# EAGLE board RAVEN_-_Final_Transponder_Layout (EAGLE 9.7.0)
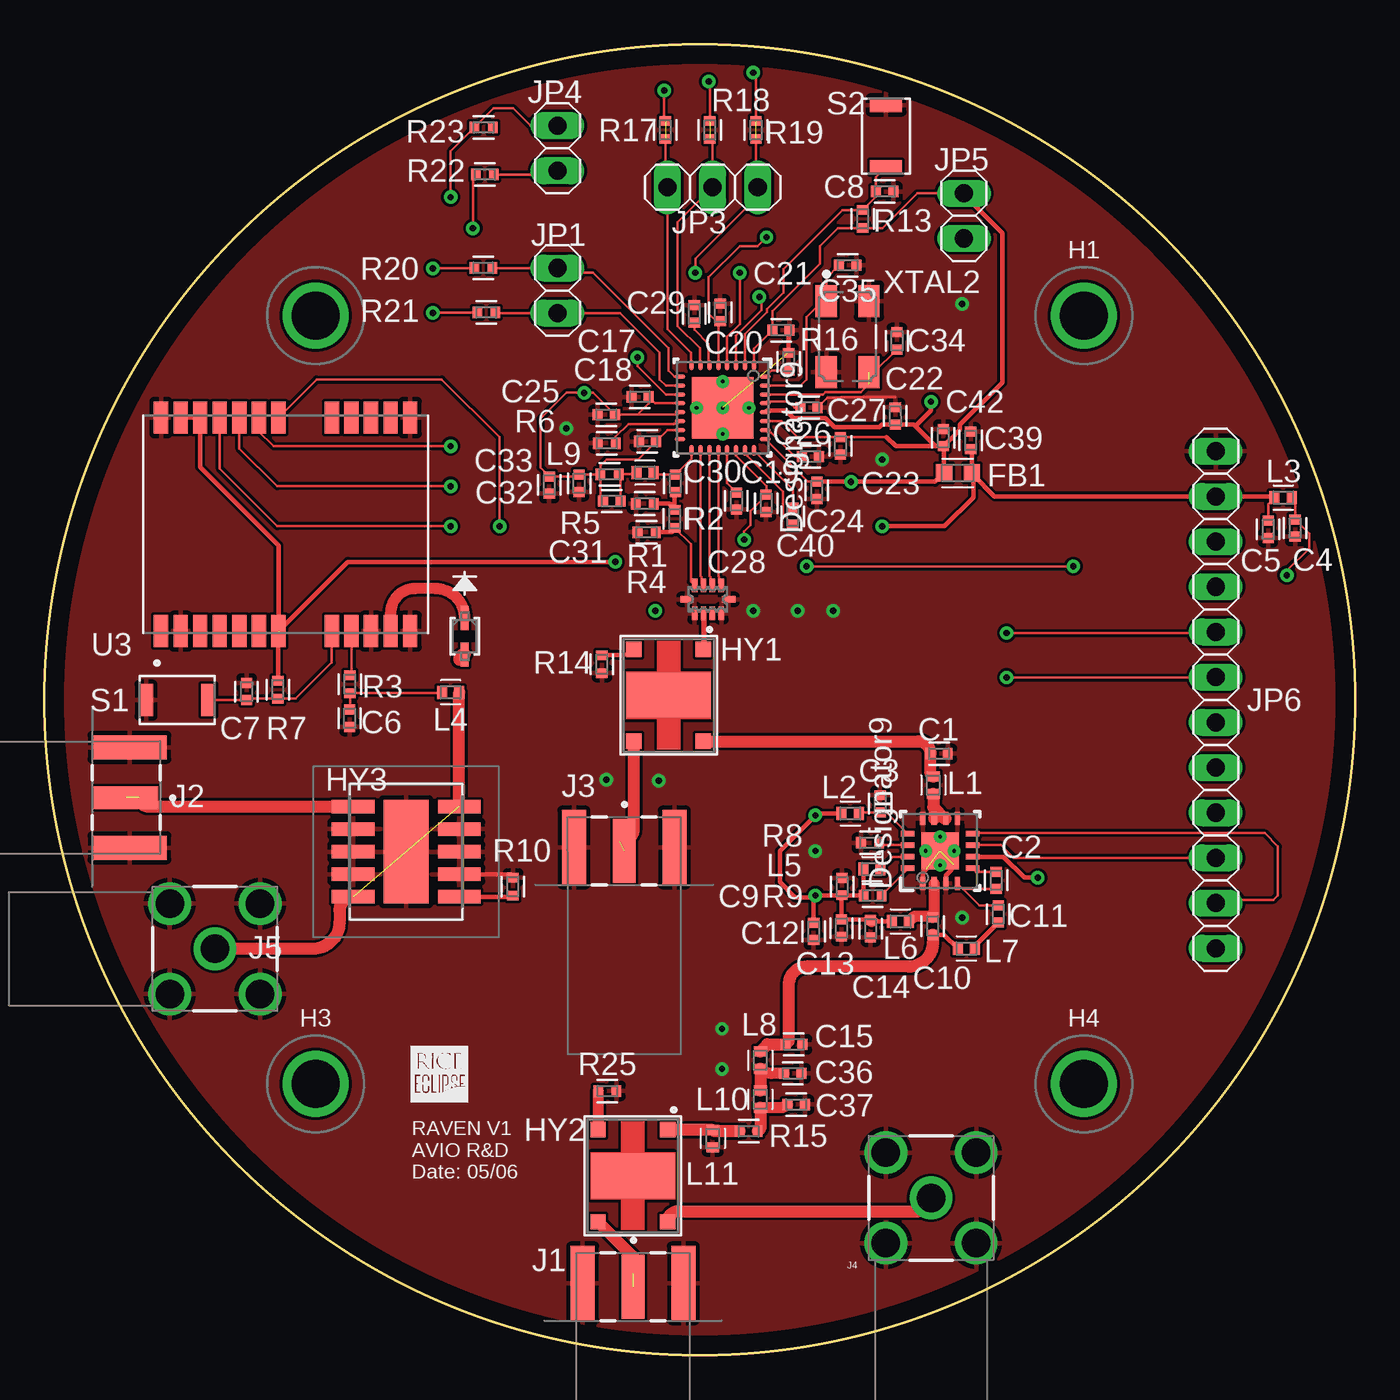
[diagram p0: board, top side]
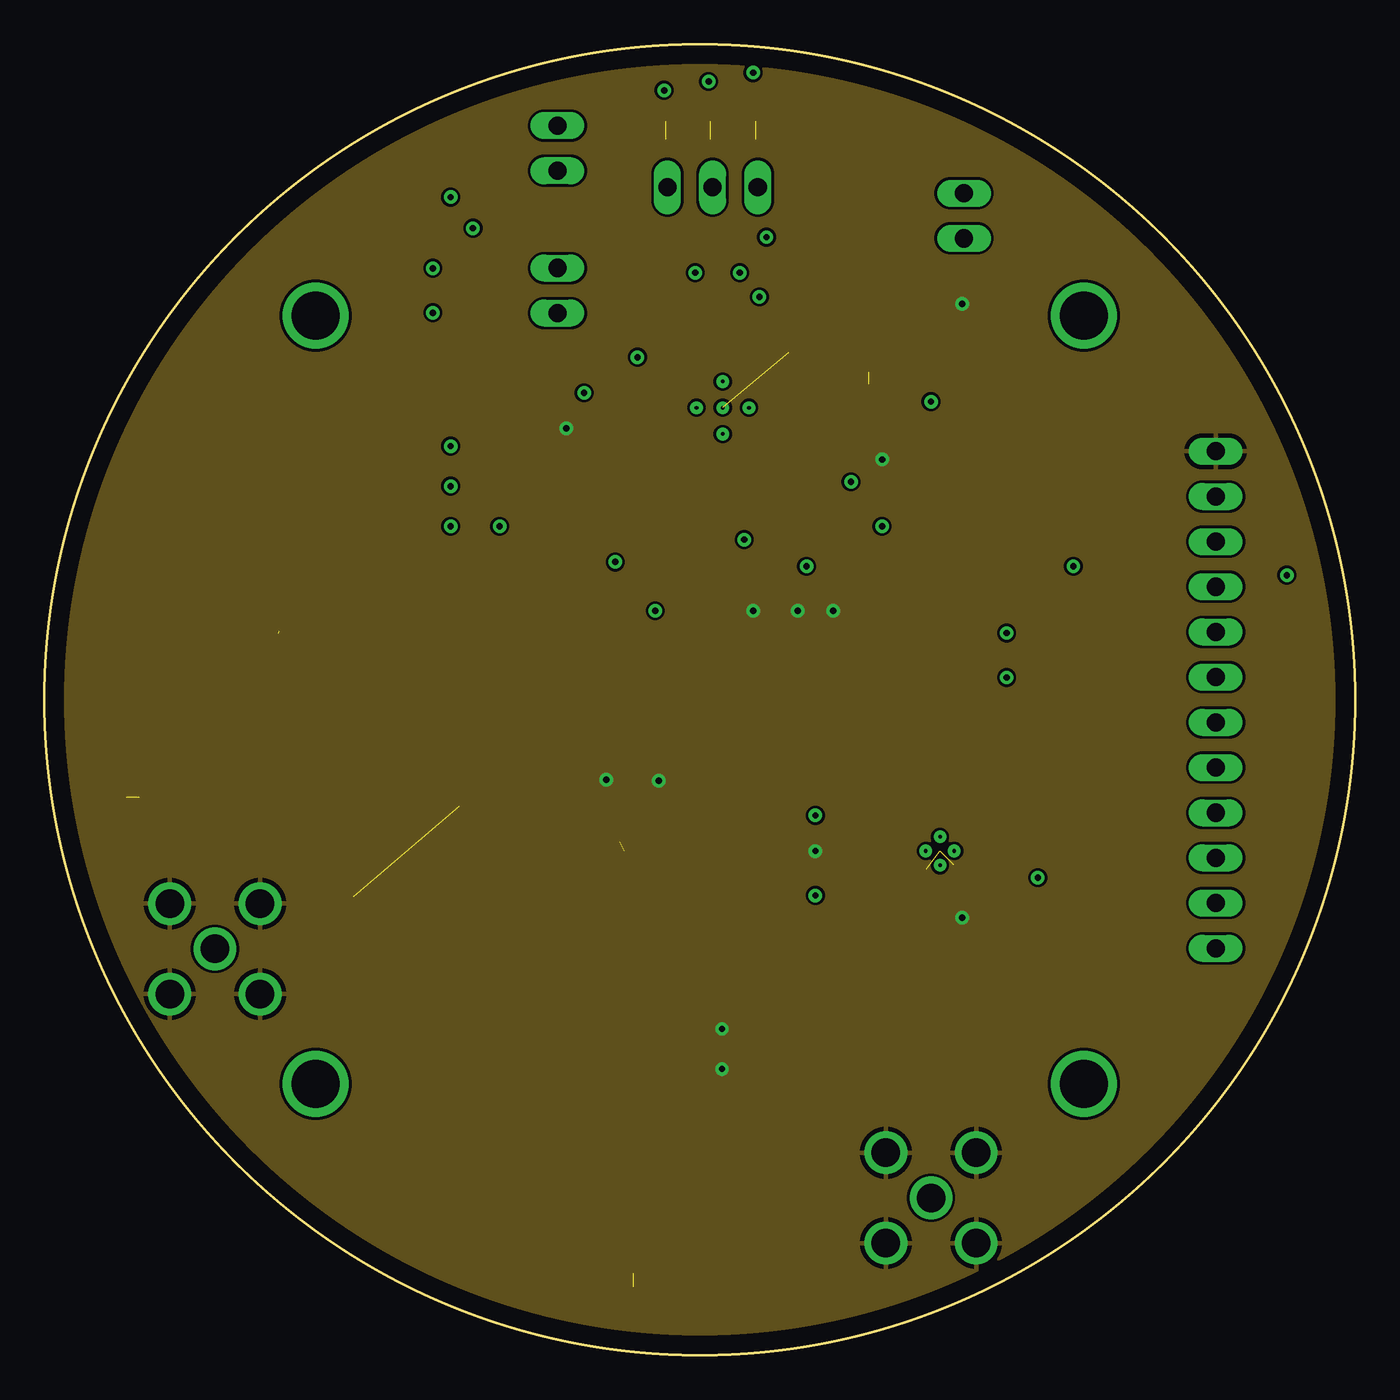
[diagram p1: board, inner layer Route2]
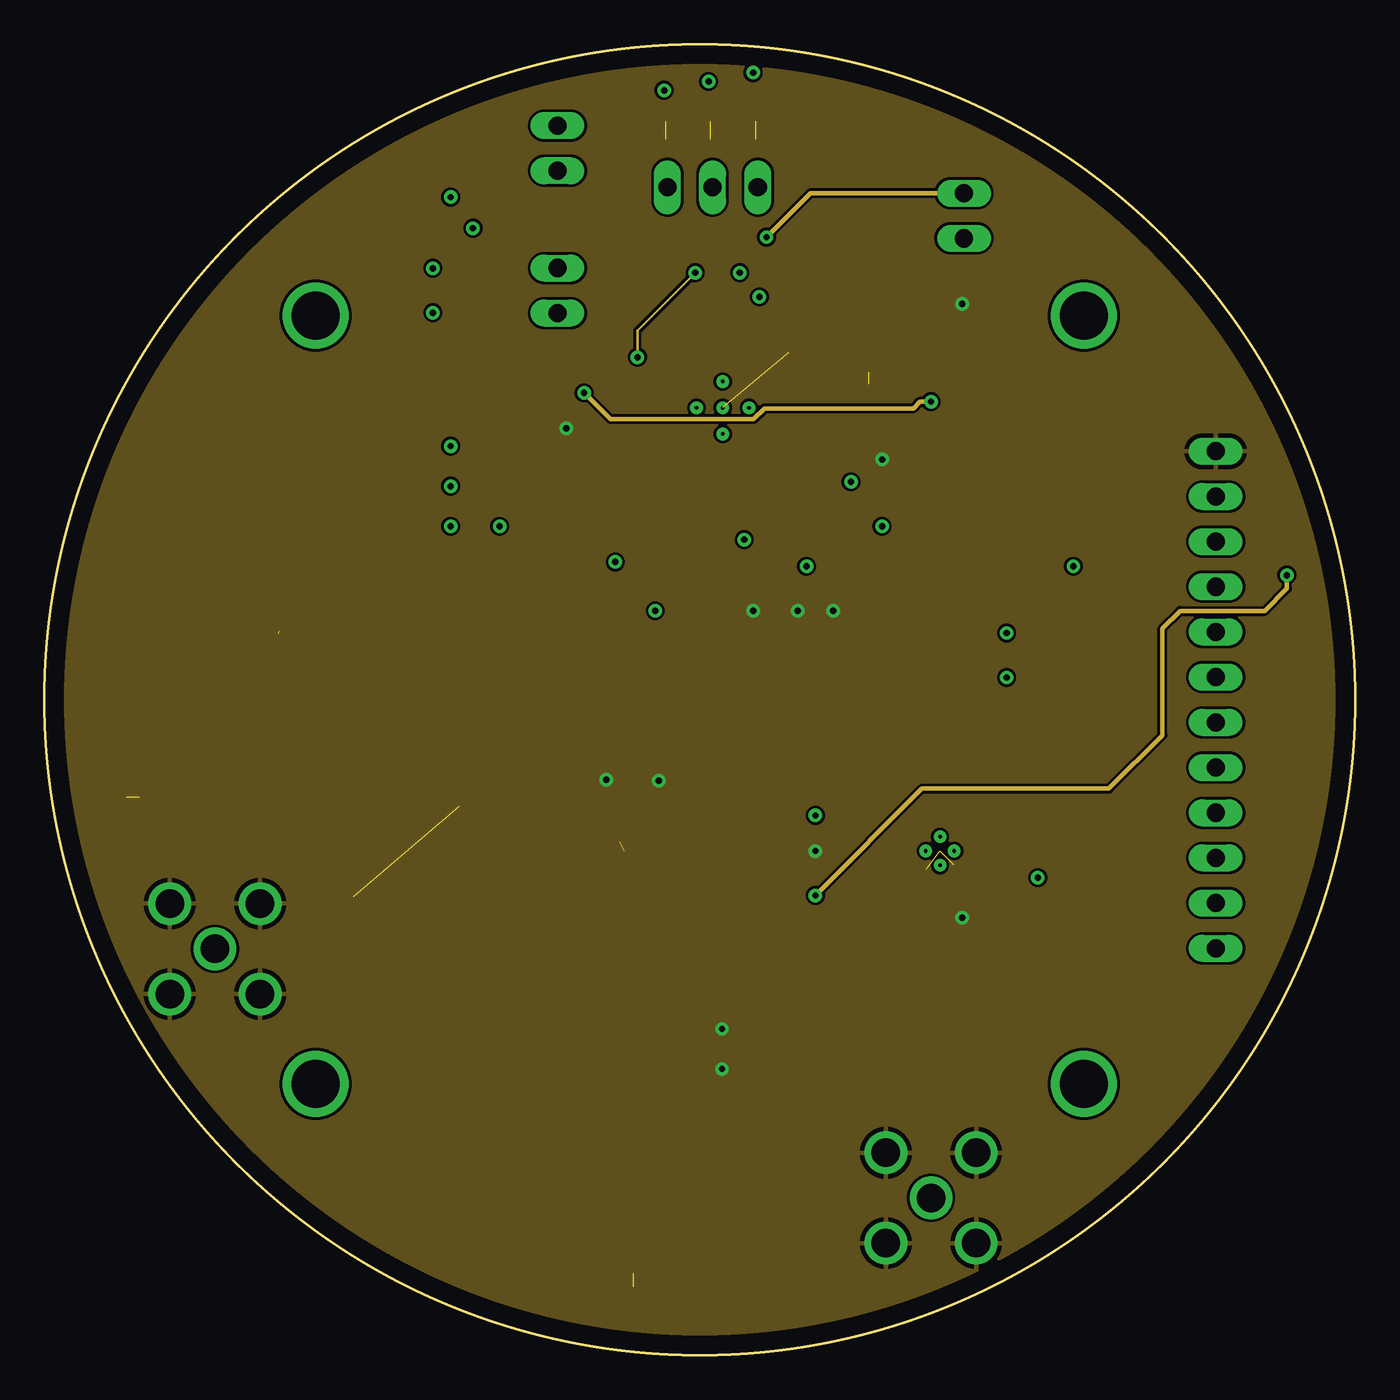
[diagram p2: board, inner layer Route15]
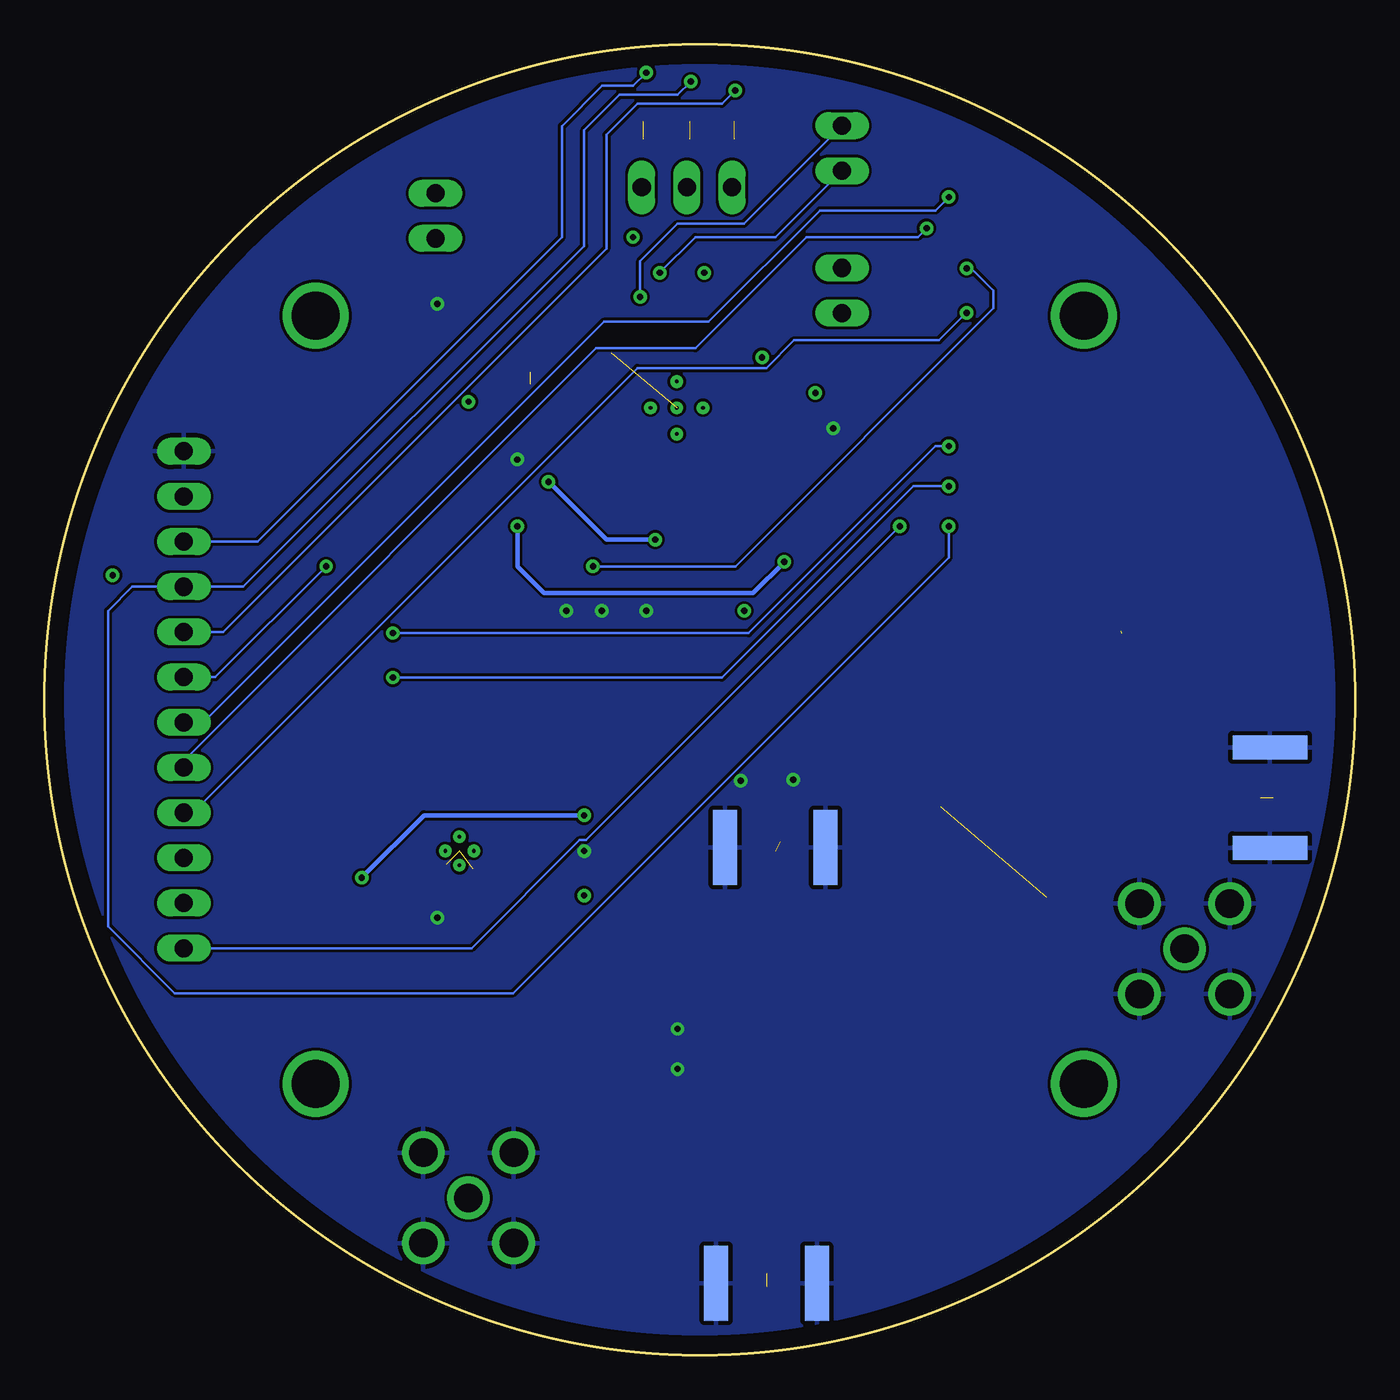
[diagram p3: board, bottom side, seen from below]

Size 73.66 x 73.66 mm. Coordinates in mm from the lower left corner, seen from the top.
Outline: circle at 36.83,36.83 radius 36.83
Copper layers (1+2*15+16): Top 0.035mm / dielectric 1.5mm / Route2 0.035mm / dielectric 0.15mm / Route15 0.035mm / dielectric 0.2mm / Bottom 0.035mm
Design rules "Fusion Electronics Design Rules *": minimum track width 6mil, minimum drill 0.35mm, track to track 6mil, track to pad 6mil, pad to pad 6mil, via to via 6mil, smd to smd 6mil, copper to edge 40mil, drill to drill 6mil, minimum pad ring 10mil, minimum via ring 8mil, stop-mask expansion 4mil, vias tented up to drill 9999mil, thermal gap 10mil
Net classes: 0 Default: width 0.15 mm, drill 0.35 mm, clearance 0.15 mm; 3 Antenna: width 1 mm, clearance 0.3 mm

## Footprints (pad centres in the part's own frame; a part is rotated, then mirrored left to right if it is on the bottom)
CAPC1005X60 = smd 0.56 x 0.629: 1 -0.485,0; 2 0.485,0
SOD323_NEX = smd 1.359 x 0.457: 1 -1.022,0; 2 1.022,0
BEADC1608X95N = smd 0.9 x 0.97: 1 -0.785,0 | smd 0.933 x 0.97: 2 0.769,0
MOUNTINGHOLE_MOUNTINGHOLE_2.7MM_M2.5 = drill 2.7 pad 2.7: UN 0,0
COUPLER_XC0900P-10S = smd 0.864 x 0.864: 1 -2.591,1.956; 2 2.591,1.956; 3 2.591,-1.956; 4 -2.591,-1.956 | smd 2.5 x 4.7: 5 0,0
BDCA1025 = smd 0.76 x 2.41: 1 -2.54,2.985; 2 -1.27,2.985; 3 0,2.985; 4 1.27,2.985; 5 2.54,2.985; 6 2.54,-2.985; 7 1.27,-2.985; 8 0,-2.985; 9 -1.27,-2.985; 10 -2.54,-2.985 | smd 5.84 x 2.54: 11 0,0
SAMTEC_SMA-J-P-H-ST-EM1 = smd 1.27 x 3.6: 1 0,0 | smd 1.35 x 4.2: 2_1 -2.825,0.2; 3_1 2.825,0.2 | smd 1.35 x 4.2 bottom: 2_2 -2.825,0.2; 3_2 2.825,0.2
SAMTEC_SMA-J-P-X-RA-TH1 = drill 1.6: 1 0,0; 2 2.54,-2.54; 3 2.54,2.54; 4 -2.54,2.54; 5 -2.54,-2.54
1X02 = drill 1.016 long: 1 -1.27,0; 2 1.27,0
1X03 = drill 1.016 long: 1 -2.54,0; 2 0,0; 3 2.54,0
1X12 = drill 1.016 long: 1 -13.97,0; 2 -11.43,0; 3 -8.89,0; 4 -6.35,0; 5 -3.81,0; 6 -1.27,0; 7 1.27,0; 8 3.81,0; 9 6.35,0; 10 8.89,0; 11 11.43,0; 12 13.97,0
INDC1006X60N = smd 0.56 x 0.729: 1 -0.485,0; 2 0.485,0
RESC1005X40 = smd 0.535 x 0.644: 1 -0.507,0; 2 0.507,0
B3U-1000P(M) = smd 0.8 x 1.8: 1 -1.75,0; 2 1.75,0
LFD21868MMF1D386_MUR = smd 0.737 x 0.305: 1 -0.787,0.75; 2 -0.787,0.25; 3 -0.787,-0.25; 4 -0.787,-0.75; 6 0.787,-0.75; 7 0.787,-0.25; 8 0.787,0.25; 9 0.787,0.75 | smd 0.356 x 0.737: 5 0,-1.168; 10 0,1.168
RHB0032E = smd 0.6 x 0.24: 1 -2.4,1.75; 2 -2.4,1.25; 3 -2.4,0.75; 4 -2.4,0.25; 5 -2.4,-0.25; 6 -2.4,-0.75; 7 -2.4,-1.25; 8 -2.4,-1.75; 17 2.4,-1.75; 18 2.4,-1.25; 19 2.4,-0.75; 20 2.4,-0.25; 21 2.4,0.25; 22 2.4,0.75; 23 2.4,1.25; 24 2.4,1.75 | smd 0.24 x 0.6: 9 -1.75,-2.4; 10 -1.25,-2.4; 11 -0.75,-2.4; 12 -0.25,-2.4; 13 0.25,-2.4; 14 0.75,-2.4; 15 1.25,-2.4; 16 1.75,-2.4; 25 1.75,2.4; 26 1.25,2.4; 27 0.75,2.4; 28 0.25,2.4; 29 -0.25,2.4; 30 -0.75,2.4; 31 -1.25,2.4; 32 -1.75,2.4 | smd 3.45 x 3.45: 33 0,0 | drill 0.203 pad 0.5: V 0,1.475; V_1 -1.475,0; V_2 0,0; V_3 1.475,0; V_4 0,-1.475
XCVR_NEO-M9N-00B = smd 1.8 x 0.8: 1 -6,7; 2 -6,5.9; 3 -6,4.8; 4 -6,3.7; 5 -6,2.6; 6 -6,1.5; 7 -6,0.4; 8 -6,-2.6; 9 -6,-3.7; 10 -6,-4.8; 11 -6,-5.9; 12 -6,-7; 13 6,-7; 14 6,-5.9; 15 6,-4.8; 16 6,-3.7; 17 6,-2.6; 18 6,0.4; 19 6,1.5; 20 6,2.6; 21 6,3.7; 22 6,4.8; 23 6,5.9; 24 6,7
RGV0016A = smd 0.75 x 0.3: 1 -1.825,0.975; 2 -1.825,0.325; 3 -1.825,-0.325; 4 -1.825,-0.975; 9 1.825,-0.975; 10 1.825,-0.325; 11 1.825,0.325; 12 1.825,0.975 | smd 0.3 x 0.75: 5 -0.975,-1.825; 6 -0.325,-1.825; 7 0.325,-1.825; 8 0.975,-1.825; 13 0.975,1.825; 14 0.325,1.825; 15 -0.325,1.825; 16 -0.975,1.825 | smd 2.1 x 2.1: 17 0,0 | drill 0.203 pad 0.5: V 0.8,0; V_1 -0.8,0; V_2 0,-0.8; V_3 0,0.8
OSCSC500X320X110-4N = smd 1.8 x 1.2: 1 -2,-1.2; 2 2,-1.2; 3 2,1.2; 4 -2,1.2

## Placement (x,y rotation side)
C1  0.8pF  [CAPC1005X60]  50.28,33.8 180 top
C2  12pF  [CAPC1005X60]  53.49,26.68 270 top
C3  15pF  [CAPC1005X60]  46.97,30.98 270 top
C4  10µF  [CAPC1005X60]  70.29,46.48 90 top
C5  220pF  [CAPC1005X60]  68.78,46.41 90 top
C6  100nF  [CAPC1005X60]  17.15,35.79 270 top
C7  100nF  [CAPC1005X60]  11.36,37.29 270 top
C8  100nF  [CAPC1005X60]  47.22,65.4 0 top
C9  27pF  [CAPC1005X60]  44.83,26.33 270 top
C10  47pF  [CAPC1005X60]  49.93,24.11 90 top
C11  15pF  [CAPC1005X60]  53.61,24.79 270 top
C12  1µF  [CAPC1005X60]  43.23,23.81 90 top
C13  1nF  [CAPC1005X60]  44.8,24 90 top
C14  47pF  [CAPC1005X60]  46.43,23.96 90 top
C15  3.3pF  [CAPC1005X60]  42.12,17.46 180 top
C17  47nF  [CAPC1005X60]  33.47,53.85 180 top
C18  47nF  [CAPC1005X60]  33.89,51.35 180 top
C19  47nF  [CAPC1005X60]  40.56,47.87 270 top
C20  47nF  [CAPC1005X60]  37.98,58.6 90 top
C21  47nF  [CAPC1005X60]  41.4,57.6 0 top
C22  47nF  [CAPC1005X60]  47.82,52.78 90.5 top
C23  47nF  [CAPC1005X60]  44.74,51.1 270 top
C24  47nF  [CAPC1005X60]  43.41,48.6 270 top
C25  47nF  [CAPC1005X60]  31.58,52.85 180 top
C26  47nF  [CAPC1005X60]  43.05,50.5 0 top
C27  47nF  [CAPC1005X60]  42.97,53.25 0 top
C28  10nF  [CAPC1005X60]  38.89,48 270 top
C29  220nF  [CAPC1005X60]  36.52,58.52 90 top
C30  15pF  [CAPC1005X60]  35.46,49 90 top
C31  33pF  [CAPC1005X60]  31.88,48 0 top
C32  10nF  [CAPC1005X60]  30.05,49 90 top
C33  100pF  [CAPC1005X60]  28.37,48.9 90 top
C34  15pF  [CAPC1005X60]  47.91,57 90 top
C35  15pF  [CAPC1005X60]  45.14,61.25 180 top
C36  7.5pF  [CAPC1005X60]  42.06,15.83 180 top
C37  DNP  [CAPC1005X60]  42.25,14.08 180 top
C39  100µF  [CAPC1005X60]  52.06,51.41 270 top
C40  1.8nF  [CAPC1005X60]  42.05,47.15 90 top
C42  2.2µF  [CAPC1005X60]  50.52,51.56 270 top
CR1  PESD5V0S1BASOD323_NEX  [SOD323_NEX]  23.62,40.4 270 top
FB1  FBCHIP-0603(1608-METRIC)  [BEADC1608X95N]  51.33,49.58 180 top
H1  MountingHole  [MOUNTINGHOLE_MOUNTINGHOLE_2.7MM_M2.5]  58.42,58.42 0 top
H2  MountingHole  [MOUNTINGHOLE_MOUNTINGHOLE_2.7MM_M2.5]  15.24,58.42 0 top
H3  MountingHole  [MOUNTINGHOLE_MOUNTINGHOLE_2.7MM_M2.5]  15.24,15.24 0 top
H4  MountingHole  [MOUNTINGHOLE_MOUNTINGHOLE_2.7MM_M2.5]  58.42,15.24 0 top
HY1  XC0900P-10S  [COUPLER_XC0900P-10S]  35.08,37.08 270 top
HY2  XC0900P-10S  [COUPLER_XC0900P-10S]  33.07,10.08 270 top
HY3  BDCA-10-25+  [BDCA1025]  20.33,28.29 270 top
J1  SMA-J-P-H-ST-EM1  [SAMTEC_SMA-J-P-H-ST-EM1]  33.08,3.83 0 top
J2  SMA-J-P-H-ST-EM1  [SAMTEC_SMA-J-P-H-ST-EM1]  4.58,31.33 270 top
J3  SMA-J-P-H-ST-EM1  [SAMTEC_SMA-J-P-H-ST-EM1]  32.58,28.33 0 top
J4  SMA-J-P-X-RA-TH1  [SAMTEC_SMA-J-P-X-RA-TH1]  49.83,8.83 90 top
J5  SMA-J-P-X-RA-TH1  [SAMTEC_SMA-J-P-X-RA-TH1]  9.58,22.83 0 top
JP1  PINHD-1X2  [1X02]  28.83,59.83 270 top
JP3  PINHD-1X3  [1X03]  37.55,65.63 0 top
JP4  PINHD-1X2  [1X02]  28.83,67.83 90 top
JP5  PINHD-1X2  [1X02]  51.68,64.03 270 top
JP6  PINHD-1X12  [1X12]  65.83,36.83 270 top
L1  10nH  [INDC1006X60N]  49.96,32.03 90 top
L2  1.5nH  [INDC1006X60N]  45.29,30.44 180 top
L3  10nH  [INDC1006X60N]  69.62,48.19 180 top
L4  27 nH  [INDC1006X60N]  22.83,37.25 0 top
L5  15nH  [INDC1006X60N]  46.51,27.32 180 top
L6  22nH  [INDC1006X60N]  48.11,24.37 180 top
L7  7.5nH  [INDC1006X60N]  51.82,22.85 180 top
L8  2.9nH  [INDC1006X60N]  40.23,16.57 90 top
L9  8.2nH  [INDC1006X60N]  33.75,49.59 0 top
L10  9.1nH  [INDC1006X60N]  40.23,14.38 90 top
L11  12nH  [INDC1006X60N]  37.56,12.17 90 top
R1  82Ω  [RESC1005X40]  33.75,47.85 0 top
R2  91Ω  [RESC1005X40]  35.42,47 90 top
R3  10Ω  [RESC1005X40]  17.17,37.71 270 top
R4  82Ω  [RESC1005X40]  33.84,46.25 0 top
R5  10Ω  [RESC1005X40]  31.76,49.5 0 top
R6  56k  [RESC1005X40]  31.6,51.25 180 top
R7  10k  [RESC1005X40]  13.12,37.4 90 top
R8  3.3k  [RESC1005X40]  46.4,28.79 0 top
R9  47  [RESC1005X40]  46.54,25.83 180 top
R10  50Ω  [RESC1005X40]  26.33,26.33 270 top
R13  10k  [RESC1005X40]  45.98,63.85 90 top
R14  50Ω  [RESC1005X40]  31.33,38.83 90 top
R15  0Ω  [RESC1005X40]  39.58,12.58 180 top
R16  0Ω  [RESC1005X40]  41.83,55.83 90 top
R17  0  [RESC1005X40]  34.9,68.85 90 top
R18  0  [RESC1005X40]  37.4,68.85 90 top
R19  0  [RESC1005X40]  39.99,68.85 90 top
R20  0  [RESC1005X40]  24.66,61.1 180 top
R21  0  [RESC1005X40]  24.83,58.6 180 top
R22  0  [RESC1005X40]  24.75,66.35 180 top
R23  0  [RESC1005X40]  24.68,69 0 top
R25  50Ω  [RESC1005X40]  31.64,14.84 180 top
S1  B3U-X000B3U-1000P(M)1000P(M)  [B3U-1000P(M)]  7.46,36.81 180 top
S2  B3U-X000B3U-1000P(M)1000P(M)  [B3U-1000P(M)]  47.3,68.51 270 top
U1  LFD21868MMF1D386LFD21868MMF1D386_MUR  [LFD21868MMF1D386_MUR]  37.29,42.47 90 top
U2  CC1200RHBRRHB0032E  [RHB0032E]  38.12,53.24 270 top
U3  NEO-M9N-00B  [XCVR_NEO-M9N-00B]  13.55,46.69 90 top
U5  CC1190RGVRRGV0016A  [RGV0016A]  50.34,28.33 90 top
XTAL2  32 MHz Crystal Oscillator  [OSCSC500X320X110-4N]  45.14,57.24 270 top

## Library data of the parts
C1-C15 C30-C37 C39 C42 = Capacitor; CATEGORY: Capacitor; PACKAGE_SIZE: 0402; PACKAGE_TYPE: Surface Mount; SUBCATEGORY: Ceramic Capacitors; TYPE: MLCC
C17-C29 C40 = Tutorial - Fusion 360; CATEGORY: Capacitor
CR1 = 2025-11-21_00-10-00_Library; COPYRIGHT: Copyright (C) 2025 Ultra Librarian. All rights reserved.; MANUFACTURER_NAME: Nexperia; MANUFACTURER_PART_NUMBER: PESD5V0S1BA
FB1 = Filter; CATEGORY: Ferrite Bead; DESCRIPTION: Generic Ferrite Bead 0603 (1608 Metric); PACKAGE_SIZE: 0603; PACKAGE_TYPE: Surface Mount
H1-H4 = Mechanical; DATASHEET: ~; FOOTPRINT: MountingHole:MountingHole_2.7mm_M2.5
HY1 HY2 = XC0900P-10S; MANUFACTURER: Anaren; MAXIMUM_PACKAGE_HEIGHT: 2.14mm; PARTREV: D; STANDARD: Manufacturer Recommendations
HY3 = BDCA-10-25+; DESCRIPTION: RF Directional Coupler Cellular, PCN, PCS 800MHz ~ 2.5GHz 10.1 +/- 2dB 50W 10-SMD, Flat Leads; HEIGHT: 1.78mm; MANUFACTURER_NAME: Mini-Circuits; MANUFACTURER_PART_NUMBER: BDCA-10-25+; MOUSER_PART_NUMBER: 139-BDCA-10-25+; MOUSER_PRICE-STOCK: https://www.mouser.co.uk/ProductDetail/Mini-Circuits/BDCA-10-25%2b?qs=Znm5pLBrcAIT4tjFMUCF%2Fg%3D%3D
J1-J3 = SMA-J-P-H-ST-EM1; MANUFACTURER: Samtec; MAXIMUM_PACKAGE_HEIGHT: 3.675mm; PARTREV: G; STANDARD: Manufacturer Recommendations
J4 J5 = SMA-J-P-X-RA-TH1; MANUFACTURER: Samtec; MAXIMUM_PACKAGE_HEIGHT: 9.86mm; PARTREV: K; STANDARD: Manufacturer Recommendations
JP1 JP4 JP5 = Connector; CATEGORY: Connectors; DESCRIPTION: Header-Straight-2 Position; PACKAGE_TYPE: Through Hole; PITCH: 0.100" (2.54mm); SUBCATEGORY: Headers; TYPE: Male Pins
JP3 = Connector; CATEGORY: Connectors; DESCRIPTION: Header-Straight-3 Position; PACKAGE_TYPE: Through Hole; PITCH: 0.100" (2.54mm); SUBCATEGORY: Headers; TYPE: Male Pins
JP6 = Connector; CATEGORY: Connectors; DESCRIPTION: Header-Straight-12 Position; PACKAGE_TYPE: Through Hole; PITCH: 0.100" (2.54mm); SUBCATEGORY: Headers; TYPE: Male Pins
L1-L11 = Inductor; CATEGORY: Inductors; DESCRIPTION: Chip 1.00 X 0.60 X 0.60 mm body 0402(1006-METRIC); PACKAGE_SIZE: 0402; PACKAGE_TYPE: Surface Mount
R1-R10 R13-R23 R25 = Resistor; CATEGORY: Resistors; DESCRIPTION: Chip Resistor 1.05 X 0.54 X 0.40 mm body 0402(1005-METRIC) Package; PACKAGE_SIZE: 0402; PACKAGE_TYPE: Surface Mount
S1 S2 = Switch; CATEGORY: Switches; DATASHEET: https://omronfs.omron.com/en_US/ecb/products/pdf/en-b3u.pdf; DESCRIPTION: Tactile Switch SPST-NO Top Actuated Surface Mount; MANUFACTURER: Omron Electronics Inc-EMC Div; MPN: B3U-1000PM; OPERATING_TEMPERATURE: -25°C ~ 70°C; PACKAGE_SIZE: NA; PACKAGE_TYPE: SMD; PART_STATUS: ACTIVE; ROHS: COMPLIANT; SERIES: B3U; SUBCATEGORY: Tactile Switches; TYPE: SPST-NO
U1 = 2025-11-22_22-16-28_Library; COPYRIGHT: Copyright (C) 2025 Ultra Librarian. All rights reserved.; MANUFACTURER_NAME: Murata; MANUFACTURER_PART_NUMBER: LFD21868MMF1D386
U2 = 2026-02-05_04-38-19_Library; COPYRIGHT: Copyright (C) 2026 Ultra Librarian. All rights reserved.; DATASHEET: https://www.ti.com/lit/gpn/cc1200; DESCRIPTION: Low power and high performance wireless transceiver 32-VQFN -40 to 85; MANUFACTURER_NAME: Texas Instruments; MANUFACTURER_PART_NUMBER: CC1200RHBR; REFDES: RefDes; TYPE: TYPE
U3 = NEO-M9N-00B; MANUFACTURER: U blox; MAXIMUM_PACKAGE_HEIGHT: 2.6mm; PARTREV: R05; STANDARD: Manufacturer Recommendations
U5 = 2025-11-22_22-42-33_Library; COPYRIGHT: Copyright (C) 2025 Ultra Librarian. All rights reserved.; DATASHEET: https://www.ti.com/lit/gpn/cc1190; DESCRIPTION: 850 - 950MHz RF front end 16-VQFN -40 to 85; MANUFACTURER_NAME: Texas Instruments; MANUFACTURER_PART_NUMBER: CC1190RGVR; REFDES: RefDes; TYPE: TYPE
XTAL2 = Frequency-Source; CATEGORY: Crystals; DATASHEET: https://abracon.com/Resonators/abm3b.pdf; DESCRIPTION: 12.288 MHz ±20 ppm Crystal 18 pF 70 Ohms 4-SMD No Lead; FREQUENCY: 12.288 MHz; FREQUENCY_STABILITY: ±50 ppm; LOAD_CAPACITANCE: 18 pF; MANUFACTURER: Abracon LLC; MPN: ABM3B-12.288MHZ-B2-T; OPERATING_TEMPERATURE: -20°C ~ 70°C; PACKAGE_SIZE: 4-SMD No Lead; PACKAGE_TYPE: Surface Mount; PART_STATUS: Active; ROHS: Compliant; SERIES: ABM3B; SUBCATEGORY: Oscillators; TOLERANCE: ±20 ppm; TYPE: Resonators

## Nets
3.3V: C5.2 C39.2 FB1.1 JP6.2 L3.2 R7.2 U3.7 U3.22 U3.23
ANT_IN: HY3.1 HY3.6 J5.1 L4.2
CLK: JP3.1 JP6.5 R17.1 R17.2 U2.8 U3.19
CS_GPS: JP6.12 U3.18
CS_RFIC: JP3.3 JP6.3 R19.1 R19.2 U2.11
GND: C1.1 C3.1 C4.1 C5.1 C6.2 C7.1 C8.2 C9.1 C12.1 C13.1 C14.1 C15.1 C17.2 C18.2 C19.2 C20.2 C21.2 C22.2 C23.2 C24.2 C25.2 C26.2 C27.2 C28.2 C29.2 C32.1 C33.1 C34.2 C35.1 C36.1 C37.1 C39.1 C42.1 HY1.5 HY2.5 HY3.2 HY3.3 HY3.4 HY3.7 HY3.8 HY3.9 HY3.11 J1.2_1 J1.2_2 J1.3_1 J1.3_2 J2.2_1 J2.2_2 J2.3_1 J2.3_2 J3.2_1 J3.2_2 J3.3_1 J3.3_2 J4.2 J4.3 J4.4 J4.5 J5.2 J5.3 J5.4 J5.5 JP6.1 L11.1 R1.1 R4.1 R6.2 R8.1 R10.1 R14.1 R16.2 R25.1 S1.2 S2.1 U1.1 U1.4 U1.5 U1.10 U2.33 U3.2 U3.10 U3.12 U3.13 U3.24 U5.1 U5.3 U5.9 U5.12 U5.17 XTAL2.2 XTAL2.4
LNA_EN_LP: JP6.10 U5.7
LNA_N: U1.6 U2.20
LNA_P: U1.7 U2.19
MISO: JP6.6 R20.2 U3.20
MISO_2: JP1.1 R20.1 U2.9
MOSI: JP3.2 JP6.4 R18.1 R18.2 U2.7 U3.21
N$1: HY1.1 U1.2
N$2: C1.2 HY1.2 L1.2
N$3: R8.2 U5.14
N$4: L5.1 U5.15
N$5: C2.2 C11.1 U5.4
N$6: C2.1 U5.5
N$7: C3.2 L2.1 U5.13
N$8: CR1.1 U3.11
N$9: R9.1 U5.16
N$10: C7.2 R7.1 S1.1 U3.8
N$11: C10.2 L6.1 U5.2
N$12: C11.2 L7.1
N$13: C6.1 L4.1 R3.2
N$14: HY1.4 R14.2
N$15: HY1.3 J3.1
N$16: HY3.10 J2.1
N$17: HY3.5 R10.2
N$19: C26.1 U2.26
N$21: C28.1 U2.21
N$22: C29.1 U2.6
N$23: R16.1 U2.32
N$25: R23.2
N$26: C27.1 U2.29
N$31: C30.2 L9.2 U2.17
N$32: C31.2 L9.1 R5.2
N$34: C30.1 R1.2 R2.2
N$35: C36.2 L8.1 L10.2
N$36: C34.1 U2.30 XTAL2.3
N$37: C35.2 U2.31 XTAL2.1
N$38: R6.1 U2.14
N$41: C40.1 U2.23
N$42: C40.2 U2.24
N$58: C37.2 L10.1 R15.1
N$59: HY2.2 J4.1
N$61: HY2.3 J1.1
N$62: HY2.4 R25.2
N$63: HY2.1 L11.2 R15.2
N$64: C10.1 C15.2 L7.2 L8.2
PA_EN_LP: JP6.11 U5.8
PA_IN: L1.1 U5.10 U5.11
RF_GPIO0: JP6.9 R21.2
RF_GPIO2: JP6.8 R22.2
RF_GPIO2_IN: JP4.1 R22.1 U2.4
RF_GPIO3: JP4.2 JP6.7 R23.1 U2.3
RF_GPIO_IN_0: JP1.2 R21.1 U2.10
RF_IN_: CR1.2
RF_RESET_N: C8.1 R13.2 S2.2 U2.2
TEST_GND: JP5.2
TRX: U1.8 U2.18
TXPA: R2.1 R4.2 U1.9
VCC_RF: R3.1 U3.9
VDD_CC1190: C4.2 C9.2 C12.2 C13.2 C14.2 L2.2 L3.1 L5.2 L6.2 R9.2 U5.6
VDD_CC1200: C17.1 C18.1 C19.1 C20.1 C21.1 C22.1 C23.1 C24.1 C25.1 C31.1 C32.2 C33.2 C42.2 FB1.2 JP5.1 R5.1 R13.1 U2.1 U2.5 U2.12 U2.13 U2.15 U2.22 U2.25 U2.27 U2.28

## Tracks (layer width: path | path; a pad name or v marks a point on that pad's centre or on a via)
3.3V  (via drill 0.35)  (1 unrouted)
  Top 0.152: 69.06,48.26 L3.2 68.78,47.83 C5.2 | 52.11,49.55 FB1.1
  Top 0.254: 69.06,48.26 JP6.2 53.4,48.26 52.2,49.45 | 52.2,49.45 52.11,49.55 | C39.2 52.11,50.87 FB1.1 | R7.2 13.12,40.55 | U3.23 U3.22 8.75,49.91 13.15,45.51 U3.7 17.04,44.58 v32.08,44.58 | v47.08,46.58 50.58,46.58 52.2,48.2 52.2,49.45
  Bottom 0.254: v32.08,44.58 33.83,42.83 45.58,42.83 47.08,44.33 v47.08,46.58
ANT_IN  (1 unrouted)
  Top 0.686: HY3.6 arc90 16.58,24.98 16.58,24.33 arc-90 15.08,22.83 J5.1 | HY3.1 L4.2 arc-90 L4.2
CLK  (via drill 0.35)  (1 unrouted)
  Top 0.152: U2.8 36.33,55.68 36.33,56.33 35.01,57.65 JP3.1 34.9,65.75 R17.1 | U3.19 12.02,52.66 12.02,51.94 12.88,51.08 v22.83,51.08 | R17.2 34.83,69.43 v34.83,71.08 | v54.08,40.58 65.77,40.58 JP6.5
  Bottom 0.152: v34.83,71.08 35.58,70.33 40.33,70.33 42.08,68.58 42.08,62.19 63.63,40.64 JP6.5 | v22.83,51.08 23.58,51.08 34.08,40.58 v54.08,40.58
CS_GPS  (via drill 0.35)
  Top 0.152: U3.18 15.29,54.83 22.33,54.83 25.58,51.58 v25.58,46.58
  Bottom 0.152: v25.58,46.58 43.22,28.94 43.58,28.94 49.66,22.86 JP6.12
CS_RFIC  (via drill 0.35)  (1 unrouted)
  Top 0.152: U2.11 34.92,53.99 33.33,55.58 v33.33,56.08 | R19.1 39.99,65.73 JP3.3 40.09,65.13 36.58,61.62 v36.58,60.83 | v39.83,72.08 39.9,72.08 39.99,71.99 R19.2
  Route15 0.152: v33.33,56.08 33.33,57.58 v36.58,60.83
  Bottom 0.152: JP6.3 61.69,45.72 44.58,62.83 44.58,69.08 42.33,71.33 40.58,71.33 v39.83,72.08
GND  (via drill 0.35)  (3 unrouted)
  Top 0.152: C27.2 44.01,53.81 44.76,53.81 44.79,53.83 47.83,53.83
  Top 0.254: HY3.4 26.15,27.02 arc-90 R10.1 | U5.1 49.36,27.11 49.58,27.33 | U5.3 50.66,26.96 50.97,27.27 50.97,27.47 51.08,27.58 | R16.2 41.83,57.55 C21.2
  other vias: 31.58,32.33 39.83,41.83 42.33,41.83 44.33,41.83 47.08,50.33 34.53,32.28 29.33,52.08 51.58,24.58 51.58,59.08 43.33,28.33 38.08,18.33 38.08,16.08
  pour Route2: 80.85,-7.09 80.87,-7.11 82.75,-8.99 82.75,57.3 66.3,73.76 -2.59,81.25 -2.59,-6.19 -2.61,-6.21 -3.49,-7.09
  pour Top: 66.6,81.74 66.41,81.75 -2.75,81.75 -2.94,81.74 -3.11,81.68 -3.27,81.6 -3.41,81.48 -6.09,78.8 -6.09,4.75 -6.08,4.56 -6.02,4.39 -5.94,4.23 -5.82,4.09 4.36,-6.09 69.41,-6.09 69.6,-6.08 69.77,-6.02 69.93,-5.94 70.07,-5.82 77.25,1.36 77.25,70.91 77.24,71.1 77.18,71.27 77.1,71.43 76.98,71.57 67.07,81.48 66.93,81.6 66.77,81.68
  pour Bottom: -8,-8.09 76.5,-8.09 76.5,76.3 73.32,79.48 73.18,79.6 73.02,79.68 72.85,79.74 72.66,79.75 -2.64,79.75 -10.82,71.57 -10.94,71.43 -11.02,71.27 -11.08,71.1 -11.09,70.91 -11.09,-5.39 -8.66,-7.82 -8.52,-7.94 -8.36,-8.02 -8.19,-8.08
  pour Route15: 3,-4.09 86,-4.09 86,62.16 85.99,62.35 85.93,62.52 85.85,62.68 85.73,62.82 70.32,78.23 70.18,78.35 70.02,78.43 69.85,78.49 69.66,78.5 -0.14,78.5 -0.82,77.82 -0.94,77.68 -1.02,77.52 -1.08,77.35 -1.09,77.16 -1.09,-0.39 2.34,-3.82 2.48,-3.94 2.64,-4.02 2.81,-4.08
LNA_EN_LP
  Top 0.152: JP6.10 54.47,27.94 53.76,28.65 U5.7
LNA_N
  Top 0.152: U2.20 37.87,43.78 37.92,43.72 37.92,43.38 U1.6
LNA_P
  Top 0.152: U2.19 37.37,43.78 37.42,43.72 37.42,43.38 U1.7
MISO  (via drill 0.35)
  Top 0.152: R20.2 24.13,61.08 v21.83,61.08 | v22.83,48.83 13.08,48.83 10.95,50.96 U3.20 | v42.83,44.33 v57.83,44.33 | v54.08,38.08 65.81,38.08 JP6.6
  Bottom 0.152: v42.83,44.33 34.83,44.33 20.33,58.83 20.33,59.83 21.58,61.08 v21.83,61.08 | v57.83,44.33 64.06,38.1 JP6.6 | v22.83,48.83 24.83,48.83 35.58,38.08 v54.08,38.08
MISO_2
  Top 0.152: U2.9 35.42,54.99 35.08,55.33 35.08,56.58 30.83,60.83 29.1,60.83 JP1.1 R20.1
MOSI  (via drill 0.35)  (1 unrouted)
  Top 0.152: U2.7 36.83,55.68 36.83,56.58 35.58,57.83 35.58,63.66 JP3.2 37.55,68.19 R18.1 | v22.83,46.58 13.08,46.58 9.85,49.81 U3.21 | v37.33,71.58 37.4,71.51 R18.2
  Bottom 0.152: 65.83,43.56 JP6.4 | v22.83,46.58 22.83,44.83 47.33,20.33 66.33,20.33 70.08,24.08 70.08,41.83 68.73,43.18 JP6.4 | JP6.4 62.48,43.18 43.33,62.33 43.33,68.83 41.33,70.83 38.08,70.83 v37.33,71.58
N$1
  Top 0.305: U1.2 37.08,41.65 37.08,39.71 HY1.1
N$2
  Top 0.686: HY1.2 49.11,34.49 arc-90 C1.2 49.8,32.68 L1.2
N$3
  Top 0.152: U5.14 47.04,28.65 R8.2
N$4
  Top 0.152: U5.15 47.68,28 L5.1
N$5
  Top 0.152: C2.2 51.62,26.2 U5.4 52.54,25.27 C11.1
N$6
  Top 0.152: U5.5 52.35,27.16 C2.1
N$7
  Top 0.152: U5.13 47.32,30.49 C3.2 45.83,30.49 L2.1
N$8
  Top 0.61: CR1.1 arc90 21.96,43.08 20.83,43.08 arc90 19.45,41.7 U3.11
N$9
  Top 0.152: U5.16 48.51,27.29 R9.1
N$10
  Top 0.152: S1.1 C7.2 11.45,36.89 R7.1 14.12,36.89 16.15,38.92 U3.8
N$11
  Top 0.61: 50.01,24.68 U5.2 | 50.01,24.68 C10.2 | 48.82,24.59 L6.1 48.9,24.68 50.01,24.68
N$12
  Top 0.254: L7.1 52.3,23 C11.2
N$13
  Top 0.152: C6.1 17.17,36.3 R3.2 22.3,37.2 L4.1
N$14
  Top 0.254: HY1.4 arc-45 32.32,39.34 R14.2
N$15  (1 unrouted)
  Top 0.686: HY1.3 33.12,29.62 arc-90 32.33,28.83
N$16  (1 unrouted)
  Top 0.686: HY3.10 5.83,30.83 arc-90 5.33,31.33
N$17
  Top 0.254: HY3.5 26.26,25.75 arc90 R10.2
N$19
  Top 0.152: U2.26 40.67,51.84 40.84,51.84 42.18,50.5 C26.1
N$21
  Top 0.152: U2.21 38.37,49 C28.1
N$22
  Top 0.152: U2.6 37.33,55.68 37.33,56.83 36.52,57.64 C29.1
N$23
  Top 0.152: U2.32 40.85,55.32 R16.1
N$24  (via drill 0.35)
  other vias: 34.33,41.83
N$26
  Top 0.152: C27.1 42.16,53.25 41.83,53.58 40.61,53.58 U2.29
N$31
  Top 0.152: U2.17 36.37,50.39 C30.2 34.34,49.48 L9.2
N$32
  Top 0.152: L9.1 33.17,49.5 R5.2 32.36,49.4 C31.2
N$34
  Top 0.254: C30.1 arc90 35.42,48.47 R2.2 arc90 35.07,47.85 R1.2
N$35
  Top 0.61: C36.2 40.85,15.83 arc-45 L8.1
  Top 0.686: L8.1 L10.2
N$36  (1 unrouted)
  Top 0.152: C34.1 46.63,55.24 XTAL2.3 | U2.30 43.76,53.99 43.88,54.11 44.64,54.11 44.66,54.13 45.88,54.13 46.33,54.58
N$37
  Top 0.152: U2.31 42.49,54.49 42.83,54.83 42.83,58.33 43.74,59.24 XTAL2.1 43.94,60.54 C35.2
N$38
  Top 0.152: U2.14 35.57,52.34 35.4,52.34 35.39,52.33 32.83,52.33 32.11,51.61 R6.1
N$41
  Top 0.152: U2.23 39.52,50.69 39.52,50.52 41.51,48.53 41.51,47.26 42.05,46.72 C40.1
N$42
  Top 0.152: U2.24 42.08,48.63 42.08,47.66 C40.2
N$58
  Top 0.61: C37.2 arc-45 41.32,13.9 L10.1
  Top 0.686: L10.1 40.23,12.72 R15.1
N$59
  Top 0.686: HY2.2 arc-90 35.62,8.08 49.08,8.08 arc90 J4.1
N$61  (1 unrouted)
  Top 0.686: HY2.3 33.08,5.52 33.08,4.58
N$62
  Top 0.61: R25.2 31.11,14.82 HY2.4
N$63
  Top 0.686: R15.2 37.63,12.58 L11.2 35.04,12.65 HY2.1
N$64
  Top 0.254: C10.1 50.56,23.62 L7.2
  Top 0.686: C10.1 49.93,23.18 arc-90 48.58,21.83 42.83,21.83 arc90 41.83,20.83 41.83,17.65 C15.2 40.63,17.46 L8.2
PA_EN_LP
  Top 0.152: JP6.11 66.01,25.58 69.08,25.58 69.33,25.83 69.33,28.58 68.58,29.33 52.19,29.33 U5.8
PA_IN
  Top 0.686: L1.1 49.96,30.78 50.01,30.73 | 50.01,30.73 U5.11 | U5.10 50.59,30.15 50.01,30.73
RF_GPIO0  (via drill 0.35)
  Top 0.152: R21.2 21.85,58.6 v21.83,58.58
  Bottom 0.152: v21.83,58.58 23.38,57.03 31.52,57.03 33.08,55.47 40.34,55.47 65.33,30.48 JP6.9
RF_GPIO2  (via drill 0.35)
  Top 0.152: R22.2 24.08,66.19 v24.08,63.33
  Bottom 0.152: v24.08,63.33 24.58,62.83 30.83,62.83 37.08,56.58 42.65,56.58 65.83,33.4 JP6.8
RF_GPIO2_IN  (via drill 0.35)
  Top 0.152: JP4.1 28.62,66.35 R22.1 | v39.08,60.83 39.08,57.94 38.37,57.23 U2.4
  Bottom 0.152: v39.08,60.83 37.08,62.83 32.56,62.83 JP4.1
RF_GPIO3  (via drill 0.35)
  Top 0.152: v22.83,65.08 22.83,67.66 R23.1 25.25,70.08 26.33,70.08 27.31,69.1 JP4.2 | U2.3 38.87,57.3 40.31,58.74 40.31,59.35 v40.18,59.47
  Bottom 0.152: JP4.2 34.35,63.58 38.08,63.58 40.18,61.47 v40.18,59.47 | v22.83,65.08 23.58,64.33 30.08,64.33 36.33,58.08 42.22,58.08 64.74,35.56 JP6.7
RF_GPIO_IN_0
  Top 0.152: U2.10 34.92,54.49 34.58,54.83 34.58,56.33 32.35,58.56 JP1.2 25.38,58.56 R21.1
RF_IN_
  Top 0.686: 23.32,39.07 arc-90 CR1.2
RF_RESET_N
  Top 0.152: U2.2 39.37,57.37 40.61,58.61 40.61,58.79 41.52,59.71 41.52,61.02 44.86,64.36 R13.2 46.73,65.11 C8.1 46.73,66.19 S2.2
TRX
  Top 0.152: U2.18 36.87,43.78 36.92,43.72 36.92,43.38 U1.8
TXPA
  Top 0.152: R2.1 36.33,45.58 36.33,43.47 U1.9
  Top 0.254: R4.2 35.18,46.25 arc90 R2.1
VCC_RF
  Top 0.152: U3.9 17.25,38.3 R3.1
VDD_CC1190  (via drill 0.35)
  Top 0.152: L3.1 70.29,48 C4.2 71.08,46.17 71.08,45.33 69.83,44.08 v69.83,43.83
  Top 0.254: L6.2 46.83,24.37 | 46.83,24.37 46.5,24.37 | 46.83,24.37 46.72,24.48 C13.2 44.8,25.81 | 44.8,25.81 C9.2 46.02,25.84 R9.2 L5.2 | L2.2 43.44,30.44 v43.33,30.33 41.33,28.33 41.33,26.58 42.18,25.73 43.23,25.73 | 44.8,25.81 44.78,25.83 v43.33,25.83 43.23,25.73 | C12.2 43.23,25.73 | U5.6 53.91,28 55.08,26.83 v55.83,26.83
  Top 0.61: 46.5,24.37 C14.2
  Route15 0.254: v43.33,25.83 49.33,31.83 59.83,31.83 62.83,34.83 62.83,40.83 63.83,41.83 68.58,41.83 69.83,43.08 v69.83,43.83
  Bottom 0.254: v55.83,26.83 52.33,30.33 v43.33,30.33
VDD_CC1200  (via drill 0.35)
  Top 0.152: C31.1 31.25,48.14 R5.1 | R5.1 31.24,49.48 C32.2 29.95,49.38 C33.2 27.87,49.88 27.87,52.62 29.33,54.08 v30.33,54.08 30.83,54.08 C25.1 33.33,52.85 | U2.22 38.87,50.54 40.58,48.83 40.58,48.38 C19.1 40.56,48.31 39.68,47.43 39.68,46.64 39.33,46.29 v39.33,45.83 | U2.15 35.02,51.99 C18.1 33.35,50.33 31.58,50.33 31.25,50 R5.1 | U2.13 35.58,52.85 33.33,52.85 | U2.12 34.31,53.49 C17.1 33.95,53.47 33.33,52.85 | U2.27 41.42,52.49 42.33,51.58 C23.1 47.33,51.59 | C24.1 42.92,49.09 U2.25 | U2.1 39.87,56.55 C21.1 40.91,58.66 43.58,61.33 43.58,62.33 44.59,63.34 R13.1 47.09,63.34 49.05,65.3 51.58,65.3 JP5.1 | 37.87,58 U2.5 | 37.87,58 C20.1 | v40.58,62.83 40.08,62.33 39.08,62.33 37.33,60.58 37.33,58.55 37.87,58
  Top 0.254: U2.28 40.61,53.08 41.67,53.08 42.09,52.66 43.91,52.66 44.41,52.16 46.93,52.16 47.07,52.3 C22.1 48.86,52.3 48.95,52.2 | C42.2 50.56,51.03 FB1.2 50.06,49.08 v45.33,49.08 C24.1 | C42.2 47.84,51.07 47.33,51.59 | C42.2 50.93,51.48 50.95,51.48 51.47,52 51.47,52.29 53.83,54.65 53.83,63.05 51.58,65.3 | C42.2 50.09,51.07 48.95,52.2 | 48.95,52.2 49.83,53.08 v49.83,53.58
  Route15 0.254: v30.33,54.08 31.8,52.6 39.86,52.6 40.46,53.2 48.83,53.2 49.2,53.58 v49.83,53.58 | JP5.1 43.05,65.3 v40.58,62.83
  Bottom 0.254: v39.33,45.83 42.08,45.83 v45.33,49.08

## Text on the board
tPlace: RAVEN V1 / AVIO R&D / Date: 05/06